# EAGLE board Control Board (EAGLE 6.2)
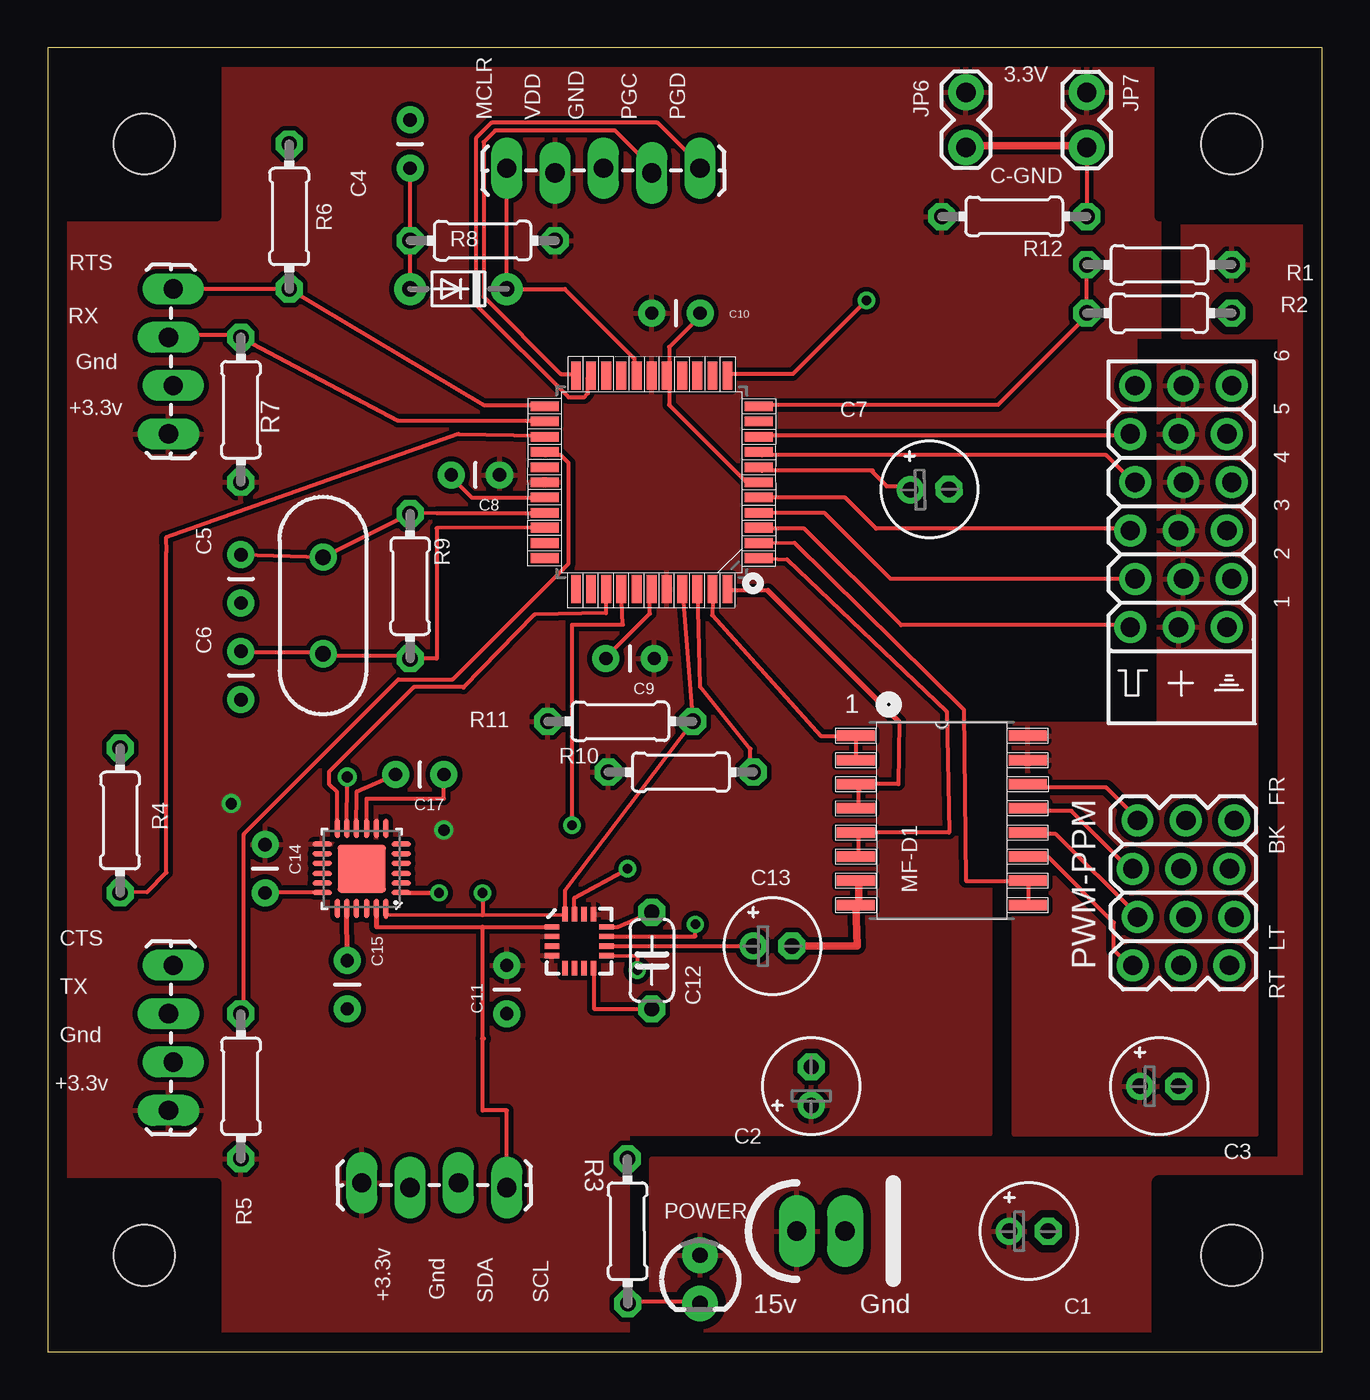
[diagram p0: board, top side]
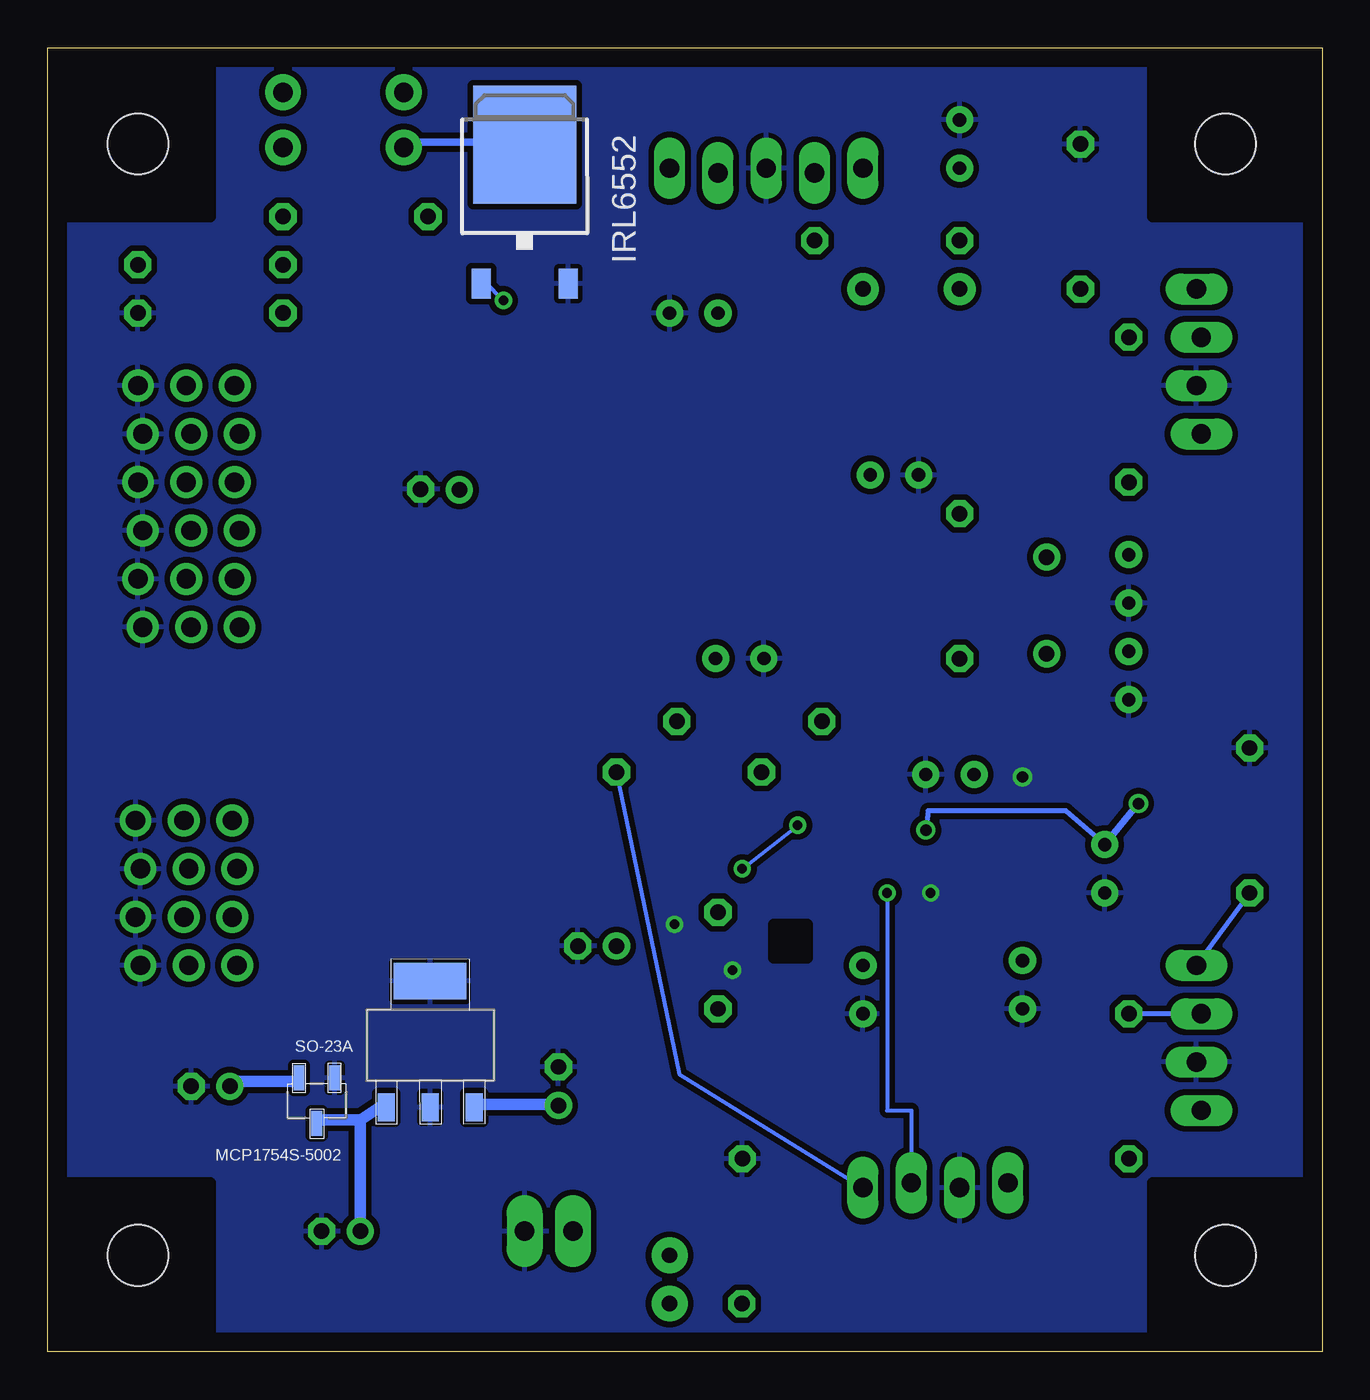
[diagram p1: board, bottom side, seen from below]

Size 66.98 x 68.57 mm. Coordinates in mm from the lower left corner, seen from the top.
Outline: 0,0 66.98,0 66.98,68.57 0,68.57 0,0
Copper layers (1*16): Top 0.035mm / dielectric 1.5mm / Bottom 0.035mm
Design rules: minimum track width 8mil, minimum drill 20mil, track to track 8mil, track to pad 8mil, pad to pad 8mil, via to via 8mil, smd to smd 8mil, copper to edge 40mil, drill to drill 8mil, minimum pad ring 12mil, minimum via ring 8mil, stop-mask expansion 4mil, vias tented up to drill 0mil, thermal gap 10mil
Net classes: 1 15V: width 0.254 mm, clearance 0.254 mm; 2 PWR: width 0.254 mm, clearance 0.254 mm
Holes 3.2 mm at 5.08,5.08 5.08,63.5 62.23,63.5 62.23,5.08
tRestrict: area 0,0 to 8.9,8.9; area 58.4,0 to 67.3,8.9; area 58.4,59.7 to 67.3,68.6; area 0,59.7 to 8.9,68.6
bRestrict: area 0,59.7 to 8.9,68.6; area 58.4,59.7 to 67.3,68.6; area 58.4,0 to 67.3,8.9; area 0,0 to 8.9,8.9

## Footprints (pad centres in the part's own frame; a part is rotated, then mirrored left to right if it is on the bottom)
E2-5 = drill 0.813 pad 1.27: + -1.016,0 | drill 0.813 pad 1.27 octagon: - 1.016,0
CAP-SMALL-2MM-SMALLPAD = drill 0.7 pad 1.422: 1 0,0; 2 2.54,0
C050-024X044 = drill 0.813 octagon: 1 -2.54,0; 2 2.54,0
CORONA-6CH-RECEIVER-FOOTPRINT = drill 1.016 pad 1.676: 1 2.794,6.35; 2 2.54,3.81; 3 2.794,1.27; 4 2.54,-1.27; 5 2.794,-3.81; 6 2.54,-6.35; G1 -2.286,6.35; G2 -2.54,3.81; G3 -2.286,1.27; G4 -2.54,-1.27; G5 -2.286,-3.81; G6 -2.54,-6.35; P1 0.254,6.35; P2 0,3.81; P3 0.254,1.27; P4 0,-1.27; P5 0.254,-3.81; P6 0,-6.35
DO34-5 = drill 0.813 pad 1.676: A 2.54,0; C -2.54,0
TO252 = smd 1 x 1.6: 1 -2.28,-4.8; 2 2.28,-4.8 | smd 5.4 x 6.2: 3 0,2.5
1X02_LONGPADS = drill 1.016 pad 1.88 long: 1 0,0; 2 2.54,0
ICSP_LOCK_LONGPADS = drill 1.016 long: 1 0,5.08; 2 -0.254,2.54; 3 0,0; 4 -0.254,-2.54; 5 0,-5.08
1X04_LOCK_LONGPADS = drill 1.016 long: 1 0,0; 2 2.54,-0.254; 3 5.08,0; 4 7.62,-0.254
1X02_LOCK = drill 1.016 pad 1.88: 1 -0.178,0; 2 2.718,0
SOT-223_3MC = smd 0.889 x 1.473: 1 -2.311,-3.277; 2 0,-3.277; 3 2.311,-3.277 | smd 3.81 x 1.93: 4 -0.02,3.37
SOT-23A_MC = smd 0.559 x 1.321: 1 -0.94,-1.194; 2 0.94,-1.194; 3 0,1.194
SOIC16_W_MC = smd 1.981 x 0.559: 1 -4.521,4.445; 2 -4.521,3.175; 3 -4.521,1.905; 4 -4.521,0.635; 5 -4.521,-0.635; 6 -4.521,-1.905; 7 -4.521,-3.175; 8 -4.521,-4.445; 9 4.521,-4.445; 10 4.521,-3.175; 11 4.521,-1.905; 12 4.521,-0.635; 13 4.521,0.635; 14 4.521,1.905; 15 4.521,3.175; 16 4.521,4.445
LED3MM = drill 0.813 pad 1.88: A -1.27,0; K 1.27,0
4CH-PWM-PPM-HEADER-PACKAGE = drill 1.016 pad 1.676: 1 3.81,2.413; 2 1.27,2.667; 3 -1.27,2.413; 4 -3.81,2.667; G1 3.81,-2.667; G2 1.27,-2.413; G3 -1.27,-2.667; G4 -3.81,-2.413; P1 3.81,-0.127; P2 1.27,0.127; P3 -1.27,-0.127; P4 -3.81,0.127
HC49US = drill 0.813: 1 -2.54,0; 2 2.54,0
0204/7 = drill 0.813 octagon: 1 -3.81,0; 2 3.81,0
HMC5883L-16LPCC = smd 0.762 x 0.28: 1 -1.433,0.75; 2 -1.433,0.25; 3 -1.433,-0.25; 4 -1.433,-0.75; 9 1.421,-0.75; 10 1.421,-0.25; 11 1.421,0.25; 12 1.421,0.75 | smd 0.28 x 0.762: 5 -0.75,-1.421; 6 -0.25,-1.421; 7 0.25,-1.421; 8 0.75,-1.421; 13 0.75,1.421; 14 0.25,1.421; 15 -0.25,1.421; 16 -0.75,1.421
MPU-6050_QFN-24-4MM2_AZ = smd 1.016 x 0.254: 1 -2.066,1.257; 2 -2.066,0.75; 3 -2.066,0.247; 4 -2.066,-0.287; 5 -2.066,-0.792; 6 -2.066,-1.297; 13 2.086,-1.297; 14 2.086,-0.792; 15 2.086,-0.287; 16 2.086,0.247; 17 2.086,0.75; 18 2.086,1.257 | smd 0.254 x 1.016: 7 -1.267,-2.122; 8 -0.762,-2.122; 9 -0.258,-2.122; 10 0.278,-2.122; 11 0.78,-2.122; 12 1.287,-2.122; 19 1.287,2.082; 20 0.78,2.082; 21 0.278,2.082; 22 -0.258,2.082; 23 -0.762,2.082; 24 -1.267,2.082 | smd 2.54 x 2.54: P$1 0,0
TQFP44_10X10MC = smd 1.473 x 0.508: 1 -5.613,3.988; 2 -5.613,3.2; 3 -5.613,2.388; 4 -5.613,1.6; 5 -5.613,0.787; 6 -5.613,0; 7 -5.613,-0.787; 8 -5.613,-1.6; 9 -5.613,-2.388; 10 -5.613,-3.2; 11 -5.613,-3.988; 23 5.613,-3.988; 24 5.613,-3.2; 25 5.613,-2.388; 26 5.613,-1.6; 27 5.613,-0.787; 28 5.613,0; 29 5.613,0.787; 30 5.613,1.6; 31 5.613,2.388; 32 5.613,3.2; 33 5.613,3.988 | smd 0.508 x 1.473: 12 -3.988,-5.613; 13 -3.2,-5.613; 14 -2.388,-5.613; 15 -1.6,-5.613; 16 -0.787,-5.613; 17 0,-5.613; 18 0.787,-5.613; 19 1.6,-5.613; 20 2.388,-5.613; 21 3.2,-5.613; 22 3.988,-5.613; 34 3.988,5.613; 35 3.2,5.613; 36 2.388,5.613; 37 1.6,5.613; 38 0.787,5.613; 39 0,5.613; 40 -0.787,5.613; 41 -1.6,5.613; 42 -2.388,5.613; 43 -3.2,5.613; 44 -3.988,5.613

## Placement (x,y rotation side)
C1  47uF  [E2-5]  51.56,6.35 0 top
C2  10uF  [E2-5]  40.13,13.97 90 top
C3  10uF  [E2-5]  58.42,13.97 0 top
C4  47nF  [CAP-SMALL-2MM-SMALLPAD]  19.05,62.23 90 top
C5  22pF  [CAP-SMALL-2MM-SMALLPAD]  10.16,39.37 90 top
C6  22pF  [CAP-SMALL-2MM-SMALLPAD]  10.16,34.29 90 top
C7  10uF  [E2-5]  46.35,45.34 1.1 top
C8  0.1uF  [CAP-SMALL-2MM-SMALLPAD]  23.75,46.1 180 top
C9  0.1uF  [CAP-SMALL-2MM-SMALLPAD]  31.88,36.45 180 top
C10  0.1uF  [CAP-SMALL-2MM-SMALLPAD]  31.75,54.61 0 top
C11  0.1uF  [CAP-SMALL-2MM-SMALLPAD]  24.13,17.78 90 top
C12  .22uF  [C050-024X044]  31.75,20.57 90 top
C13  4.7uF  [E2-5]  38.1,21.34 0 top
C14  0.1uF  [CAP-SMALL-2MM-SMALLPAD]  11.43,26.67 270 top
C15  2.2nF  [CAP-SMALL-2MM-SMALLPAD]  15.75,20.57 270 top
C17  0.1uF  [CAP-SMALL-2MM-SMALLPAD]  20.83,30.35 180 top
CR1  CORONA-6CH-RECEIVER  [CORONA-6CH-RECEIVER-FOOTPRINT]  59.69,44.45 180 top
D1  1N914  [DO34-5]  21.59,55.88 180 top
IRL6552  IRLR6225_MOSFET  [TO252]  41.91,60.96 0 bottom
JP1  Battery  [1X02_LONGPADS]  41.91,6.35 180 top
JP2  ICSP  [ICSP_LOCK_LONGPADS]  29.21,62.23 90 top
JP3  RX(In)  [1X04_LOCK_LONGPADS]  6.35,48.26 90 top
JP4  TX(Out)  [1X04_LOCK_LONGPADS]  6.35,12.7 90 top
JP5  I2C  [1X04_LOCK_LONGPADS]  16.51,8.89 0 top
JP6  [1X02_LOCK]  48.26,66.04 270 top
JP7  [1X02_LOCK]  54.61,63.5 90 top
MCP1703X-3302  SOT-223-3  [SOT-223_3MC]  46.86,16.13 0 bottom
MCP1754S-5002  SO-23A  [SOT-23A_MC]  52.83,13.21 180 bottom
MF-D1  TC4469XOE  [SOIC16_W_MC]  46.99,27.94 0 top
POWER  [LED3MM]  34.29,3.81 270 top
PWM-PPM  4CH-PWM-PPM-HEADER  [4CH-PWM-PPM-HEADER-PACKAGE]  59.69,24.13 90 top
Q1  12MHz  [HC49US]  14.48,39.24 90 top
R1  8.2k  [0204/7]  58.42,57.15 180 top
R2  2.2k  [0204/7]  58.42,54.61 0 top
R3  4.7K  [0204/7]  30.48,6.35 270.2 top
R4  40k  [0204/7]  3.81,27.94 90 top
R5  40k  [0204/7]  10.16,13.97 270 top
R6  40k  [0204/7]  12.7,59.69 90 top
R7  40k  [0204/7]  10.16,49.53 270 top
R8  4.7K  [0204/7]  22.86,58.42 180 top
R9  1M  [0204/7]  19.05,40.26 270 top
R10  3.3K  [0204/7]  33.27,30.48 180 top
R11  3.3K  [0204/7]  30.1,33.15 180 top
R12  100K  [0204/7]  50.8,59.69 180 top
U1  HMC5883LSMD  [HMC5883L-16LPCC]  27.94,21.59 0 top
U$1  MPU-6050-1  [MPU-6050_QFN-24-4MM2_AZ]  16.51,25.4 180 top
U$3  PIC24HJ128GP204_AZ  [TQFP44_10X10MC]  31.75,45.72 180 top

## Library data of the parts
C1-C3 C7 C12 C13 = rcl
C4-C6 C8-C11 C14 C15 C17 CR1 D1 IRL6552 JP2 MCP1703X-3302 MCP1754S-5002 MF-D1 POWER PWM-PPM U1 U$1 U$3 = AZ Custom
JP1 JP3-JP7 Q1 = SparkFun
R1-R12 = resistor

## Nets
3.3V [PWR]: C2.+ C8.1 C9.1 C10.1 C11.2 C14.1 JP2.2 JP3.1 JP4.1 JP5.1 JP6.1 JP7.2 MCP1703X-3302.3 R5.2 R7.2 R8.1 R10.2 R11.2 R12.2 U1.2 U1.4 U1.13 U$1.8 U$1.13 U$3.17 U$3.28 U$3.40
5V [PWR]: C3.+ CR1.P1 CR1.P2 CR1.P3 CR1.P4 CR1.P5 CR1.P6 MCP1754S-5002.2 MF-D1.15 MF-D1.16
15V [15V]: C1.+ JP1.2 MCP1703X-3302.1 MCP1754S-5002.3 POWER.A R1.1
BCHK: R1.2 R2.1 U$3.11
BLI: IRL6552.1 U$3.12
C1: C13.+ U1.10
CH1: CR1.1 U$3.3
CH2: CR1.2 U$3.4
CH3: CR1.3 U$3.5
CH4: CR1.4 U$3.8
CH5: CR1.5 U$3.9
GND: C1.- C2.- C3.- C4.2 C5.1 C6.1 C7.- C8.2 C9.2 C10.2 C11.1 C13.- C14.2 C15.2 C17.1 CR1.G1 CR1.G2 CR1.G3 CR1.G4 CR1.G5 CR1.G6 IRL6552.2 JP1.1 JP2.3 JP3.2 JP4.2 JP5.2 MCP1703X-3302.2 MCP1703X-3302.4 MCP1754S-5002.1 MF-D1.7 MF-D1.8 PWM-PPM.G1 PWM-PPM.G2 PWM-PPM.G3 PWM-PPM.G4 R2.2 R3.1 R4.2 R6.2 U1.9 U1.11 U$1.1 U$1.9 U$1.11 U$1.18 U$3.6 U$3.16 U$3.29 U$3.39
INT-AG: U$1.12 U$3.36
INT-M: U1.15 U$3.37
MCLR: D1.C JP2.1 U$3.18
N$1: C4.1 D1.A R8.2
N$2: IRL6552.3 JP6.2 JP7.1 R12.1
N$3: C17.2 U$1.10
N$5: POWER.K R3.2
N$6: C15.1 U$1.20
OC1: MF-D1.1 MF-D1.2 U$3.43
OC2: MF-D1.3 MF-D1.4 U$3.44
OC3: MF-D1.5 MF-D1.6 U$3.1
OC4: MF-D1.9 MF-D1.10 U$3.2
OSCI: C5.2 Q1.2 R9.1 U$3.30
OSCO: C6.2 Q1.1 R9.2 U$3.31
PGC: JP2.4 U$3.22
PGD: JP2.5 U$3.21
PWM1: MF-D1.14 PWM-PPM.1
PWM2: MF-D1.13 PWM-PPM.2
PWM3: MF-D1.12 PWM-PPM.3
PWM4: MF-D1.11 PWM-PPM.4
SCL: JP5.4 R10.1 U1.1 U$1.23 U$3.42
SDA: JP5.3 R11.1 U1.16 U$1.24 U$3.41
SETC: C12.2 U1.12
SETP: C12.1 U1.8
U1CTS: JP4.4 R4.1 U$3.25
U1RTS: JP3.4 R6.1 U$3.23
U1RX: JP3.3 R7.1 U$3.24
U1TX: JP4.3 R5.1 U$3.26
VCAP: C7.+ U$3.7

## Tracks (layer width: path | path; a pad name or v marks a point on that pad's centre or on a via)
3.3V  (via drill 0.6)
  Bottom 0.254: 44.45,13.01 MCP1703X-3302.3 | 40.18,13.01 C2.+ | C14.1 13.46,28.45 20.7,28.45 v20.83,27.43
  Bottom 0.406: v9.65,28.83 C14.1
  Bottom 0.61: 40.18,13.01 44.45,13.01
  pour Top (isolate 0.254): 30.48,0 0,0 0,68.58 58.42,68.58 58.42,53.34 57.15,53.34 57.15,34.29 49.53,34.29 49.53,11.43 30.48,11.43
5V
  Bottom 0.254: 57.05,14.22 57.25,14.02 C3.+ | 53.8,14.22 MCP1754S-5002.2
  Bottom 0.61: 57.05,14.22 53.8,14.22
  pour Top (isolate 0.305): 63.5,11.43 50.8,11.43 50.8,33.02 58.42,33.02 58.42,52.07 63.5,52.07
15V
  Bottom 0.254: 50.52,12.19 50.55,12.19 | 52.78,12.19 MCP1754S-5002.3 | 49.33,13.01 MCP1703X-3302.1
  Bottom 0.61: 52.78,12.19 50.55,12.19 C1.+ | 49.33,13.01 50.52,12.19
  pour Top (isolate 0.406): 31.75,0 31.75,10.16 64.77,10.16 64.77,53.34 59.69,53.34 59.69,68.58 67.31,68.58 67.31,0
BCHK
  Top 0.203: U$3.11 37.54,49.78 49.94,49.78 54.61,54.46 R2.1 R1.2
BLI  (via drill 0.51)
  Top 0.203: v43.03,55.27 39.17,51.41 35.92,51.41 U$3.12
  Bottom 0.203: v43.03,55.27 44.04,56.29 IRL6552.1
C1
  Top 0.203: U1.10 C13.+
CH1
  Top 0.203: U$3.3 37.54,43.28 39.78,43.28 44.86,38.2 56.84,38.2 CR1.1
CH2
  Top 0.203: CR1.2 44.3,40.64 40.84,44.09 37.54,44.09 U$3.4
CH3
  Top 0.203: U$3.5 37.54,44.91 41.91,44.91 43.54,43.28 56.84,43.28 CR1.3
CH4
  Top 0.203: U$3.8 37.54,47.14 55.63,47.14 57.05,45.72 CR1.4
CH5
  Top 0.203: U$3.9 37.54,48.16 56.84,48.16 CR1.5
GND  (via drill 0.5, 0.6)
  Top 0.203: U$1.9 16.76,29.08 20.83,29.08 C17.1 | U$1.11 v15.75,30.23 | 42.62,23.57 MF-D1.8 | 42.62,24.59 MF-D1.7 | U$1.18 14.38,24.18 11.53,24.18 C14.2 | C10.2 34.29,54.46 32.66,52.83 32.66,51.41 U$3.16 32.66,51.21 32.66,49.78 36.73,45.72 U$3.6 | U1.9 30.99,20.83 v30.99,20.07 | U1.11 34.04,21.84 v34.04,22.48 | U$3.29 25.96,44.91 22.3,44.91 21.29,45.92 C8.2 | U$3.39 31.65,40.03 31.65,38.81 29.41,36.58 C9.2
  Top 0.254: U$1.1 v20.57,24.13
  Top 0.406: 42.62,24.59 42.62,23.57 | C13.- 42.55,21.34 MF-D1.8
  pour Bottom (isolate 0.305): 0,68.58 67.31,68.58 67.31,0 0,0
INT-AG
  Top 0.203: U$1.12 15.19,27.64 15.19,29.46 14.78,29.87 14.78,30.48 19.25,34.95 21.84,34.95 21.84,34.92 25.58,38.76 29.34,38.84 29.34,40.03 U$3.36
INT-M  (via drill 0.5)
  Top 0.203: U1.15 27.69,23.88 v30.48,25.4 | v27.56,27.69 27.56,38.23 30.23,38.23 U$3.37
  Bottom 0.203: v30.48,25.4 v27.56,27.69
MCLR
  Top 0.203: U$3.18 30.84,51.41 30.84,52.22 27.18,55.88 D1.C JP2.1
N$1
  Top 0.203: D1.A R8.2 C4.1
N$2
  Top 0.203: R12.1 JP7.1 54.61,63.4 | 48.31,63.4 JP6.2
  Top 0.406: 54.61,63.4 48.31,63.4
  Bottom 0.203: 47.9,63.6 48.11,63.4 JP6.2 | 42.01,63.6 IRL6552.3
  Bottom 0.406: 47.9,63.6 42.01,63.6
N$3
  Top 0.203: U$1.10 16.26,29.46 C17.2
N$5
  Top 0.203: R3.2 30.63,2.64 34.29,2.64 POWER.K
N$6
  Top 0.254: C15.1 U$1.20
OC1
  Top 0.203: 42.62,31.29 MF-D1.2 MF-D1.1 | 42.62,32.31 MF-D1.1 | U$3.43 34.95,39.42 34.92,38.73 40.64,32.38 MF-D1.1
OC2
  Top 0.203: 42.62,29.46 42.62,28.65 MF-D1.4 | 42.62,29.46 42.62,29.67 MF-D1.3 | 42.67,29.67 MF-D1.3 | 37.85,40.03 35.76,40.03 U$3.44 | 42.67,29.46 42.62,29.46 | 44.76,33.12 44.7,29.84 MF-D1.3
  Top 0.254: 44.76,33.12 37.85,40.03
OC3
  Top 0.203: MF-D1.6 42.62,26.21 42.62,27.23 MF-D1.5 47.37,27.3 47.24,33.66 38.86,41.66 U$3.1
OC4
  Top 0.203: MF-D1.9 51.56,23.57 51.56,24.59 MF-D1.10 48.26,24.77 48.13,33.78 39.24,42.55 U$3.2
OSCI
  Top 0.203: U$3.30 25.96,44.09 20.47,44.09 R9.1 Q1.2 C5.2
OSCO
  Top 0.203: U$3.31 20.45,43.31 20.45,36.45 R9.2 18.9,36.58 14.63,36.58 Q1.1 14.43,36.78 10.16,36.78 C6.2
PGC
  Top 0.203: U$3.22 27.58,51.41 26.98,51.41 22.91,55.47 22.91,63.6 23.52,64.21 29.82,64.21 31.65,62.38 31.65,61.98 JP2.4
PGD
  Top 0.203: U$3.21 28.4,51.21 28.4,50.39 28.19,50.19 27.38,50.19 22.5,55.07 22.5,63.8 23.32,64.62 32.05,64.62 34.29,62.38 JP2.5
PWM1
  Top 0.203: MF-D1.14 51.56,29.67 55.63,29.67 57.25,28.04 PWM-PPM.1
PWM2
  Top 0.203: MF-D1.13 51.56,28.45 53.8,28.45 56.84,25.4 PWM-PPM.2
PWM3
  Top 0.203: MF-D1.12 51.56,27.23 52.98,27.23 57.25,22.96 PWM-PPM.3
PWM4
  Top 0.203: MF-D1.11 51.56,26.01 52.58,26.01 56.03,22.55 56.03,21.13 56.84,20.32 PWM-PPM.4
SCL
  Top 0.203: 17.27,22.35 22.86,22.34 | 22.86,22.34 U1.1 | JP5.4 24.13,12.7 22.86,12.7 22.86,16.47 22.86,22.34 | U$3.42 34.16,40.03 34.29,34.98 36.93,31.7 36.93,30.48 R10.1
  Top 0.254: U$1.23 17.27,22.35 | 22.91,16.46 22.86,16.47
  Bottom 0.203: R10.1 33.78,14.61 JP5.4
SDA  (via drill 0.5)
  Top 0.203: 22.86,22.97 17.78,22.99 17.78,22.86 | 22.86,22.97 U1.16 27.18,24.26 R11.1 U$3.41 | v22.86,24.13 22.86,22.97
  Top 0.254: U$1.24 17.78,22.99
  Bottom 0.203: v22.86,24.13 22.86,12.7 21.59,12.7 JP5.3
SETC
  Top 0.203: U1.12 29.97,22.35 C12.2
SETP
  Top 0.203: U1.8 28.7,18.03 C12.1
U1CTS
  Top 0.203: U$3.25 25.96,48.16 21.59,48.26 6.22,42.8 6.25,42.06 6.25,25.2 5.23,24.18 R4.1
  Bottom 0.254: R4.1 JP4.4
U1RTS
  Top 0.203: U$3.23 25.96,49.78 22.91,49.78 R6.1 JP3.4
U1RX
  Top 0.203: 25.7,48.97 U$3.24 25.76,48.97 18.39,48.97 10.31,53.24 R7.1 10.11,53.44 6.45,53.44 JP3.3
U1TX
  Top 0.203: U$3.26 26.16,47.14 26.98,47.14 27.38,46.74 27.38,41.45 21.29,35.36 18.44,35.36 10.31,27.23 10.31,17.88 R5.1
  Bottom 0.254: JP4.3 R5.1
VCAP
  Top 0.203: 43.38,46.33 43.28,46.33 | 43.28,46.33 37.54,46.33 U$3.7 | 43.28,46.33 44.09,45.52 45.31,45.52 C7.+

## Text on the board
tPlace: 3.3V | MCLR | VDD | GND | PGC | PGD | C-GND | RTS | RX | Gnd | 6 | +3.3v | 5 | 4 | 3 | 2 | 1 | FR | BK | CTS | LT | TX | RT | Gnd | +3.3v | Gnd | SDA | SCL | +3.3v | 15v | Gnd